# Altium PCB PTT Board.PcbDoc
Units mm, origin at the board's own origin, x right, y up, seen from the top; angles counter-clockwise.
Board outline 40 x 13.25 mm, 2 copper layers (Top Layer, Bottom Layer), stack 1.621 mm thick; 8 components, 6 nets, 26 pads, 1 vias.
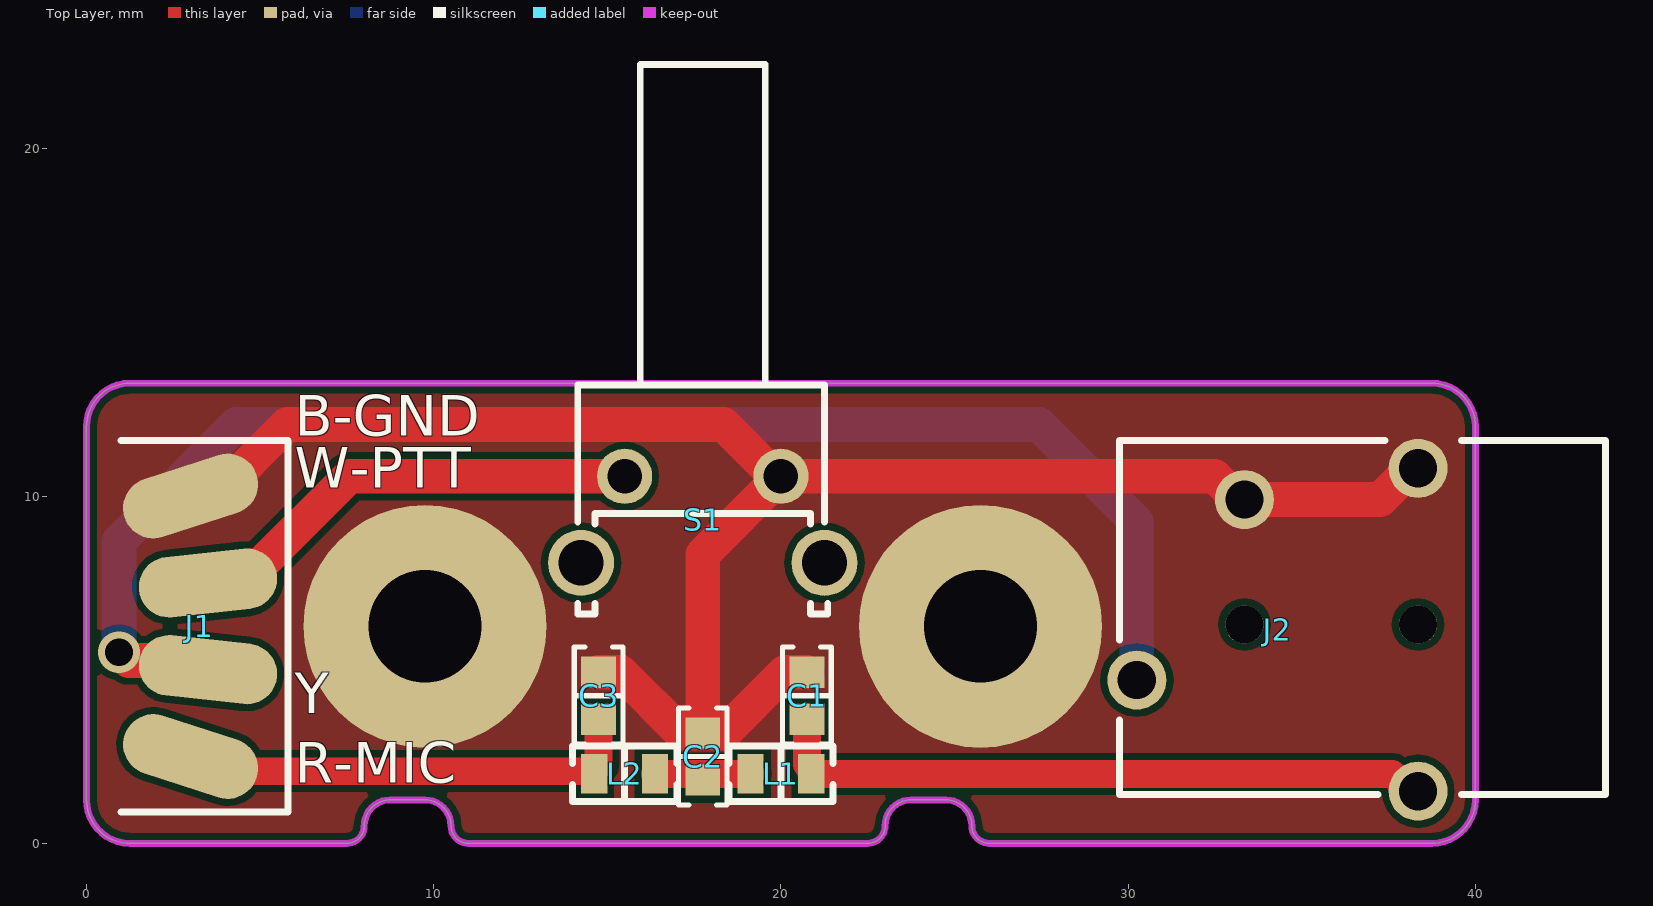
[diagram p0: Top Layer view]
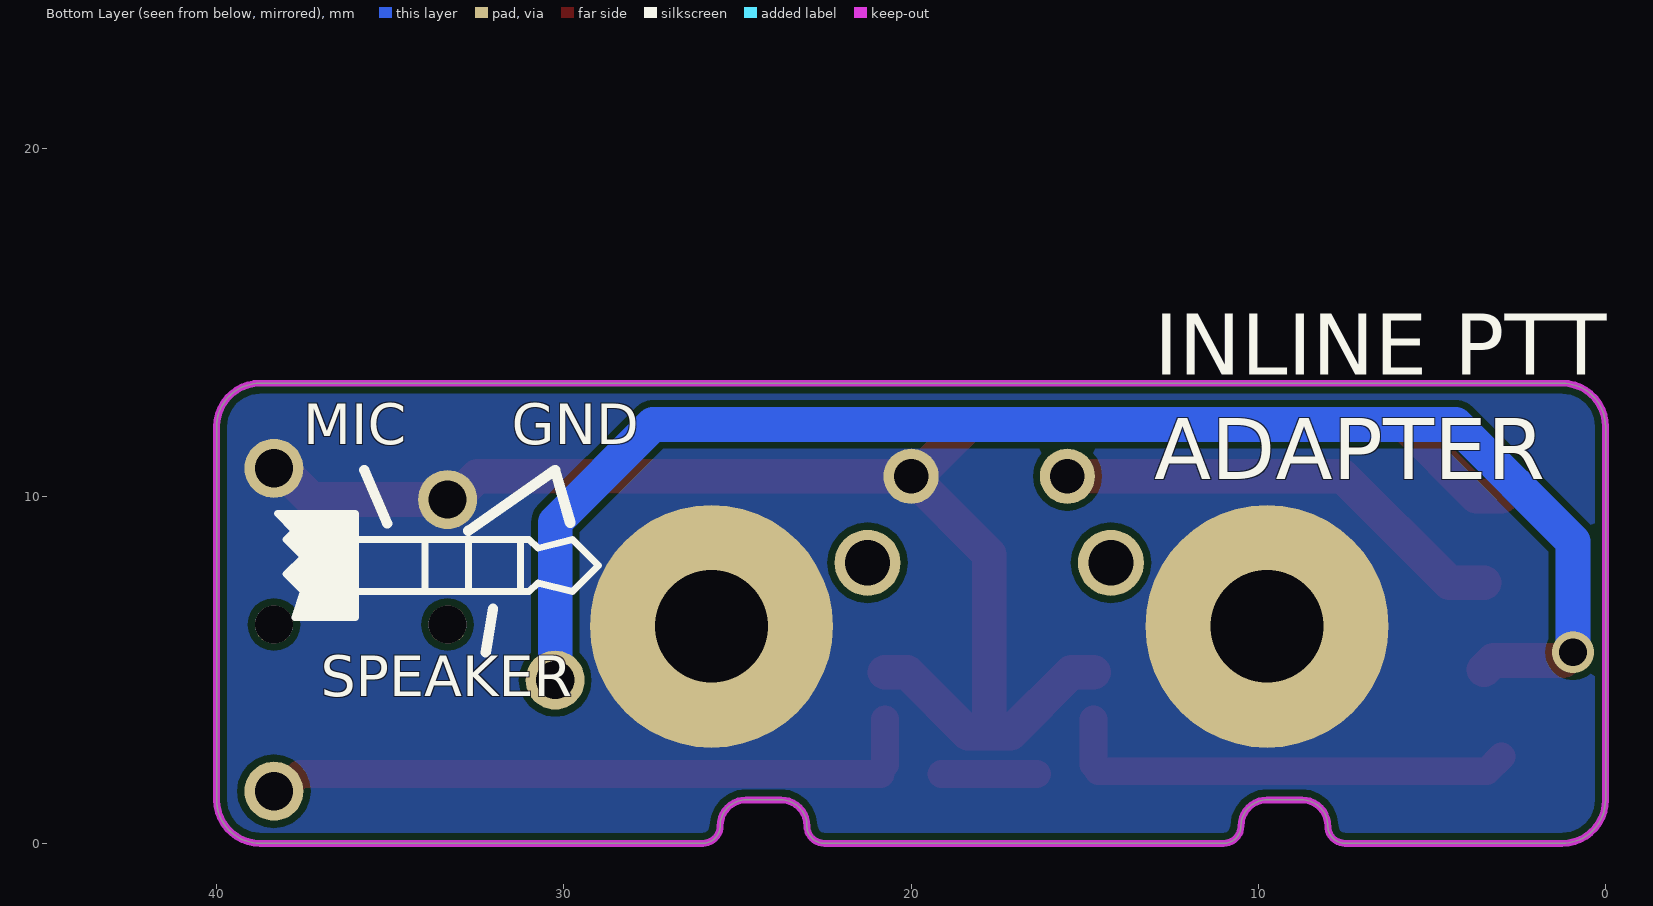
[diagram p1: Bottom Layer view, seen from below]
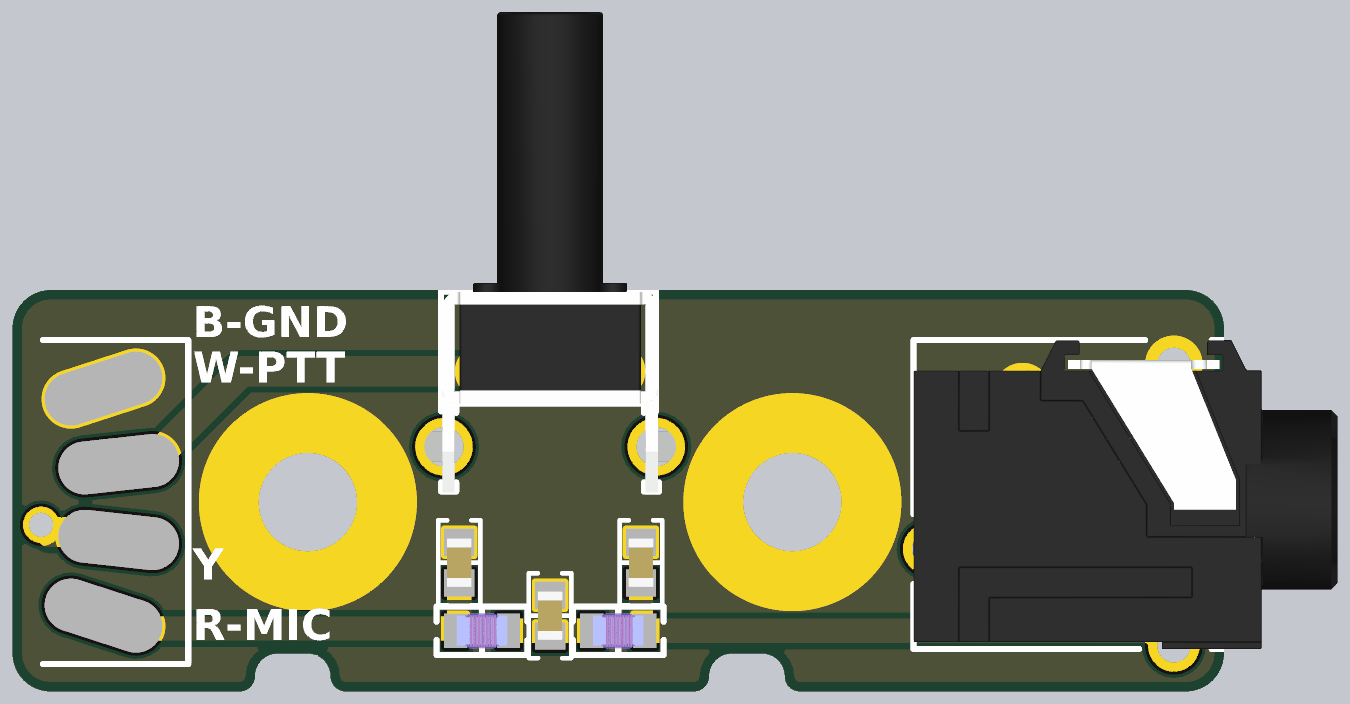
[diagram p2: 3D render of the assembled board from above, using the file's embedded part models]

## Layer stack, top to bottom
Top Solder: solder mask 0.0102, Solder Resist, Dk 3.5
Top Layer: signal copper 0.0356
Dielectric1: core 1.55, FR-4, Dk 4.8
Bottom Layer: signal copper 0.0356
Bottom Solder: solder mask 0.0102, Solder Resist, Dk 3.5

## Board outline
1.25,0 7.5,0 ccw(c7.5,0.5) 8,0.5 cw(c8.75,0.5) 8.75,1.25 9.75,1.25 cw(c9.75,0.5) 10.5,0.5 ccw(c11,0.5) 11,0 22.5,0 ccw(c22.5,0.5) 23,0.5 cw(c23.75,0.5) 23.75,1.25 24.75,1.25 cw(c24.75,0.5) 25.5,0.5 ccw(c26,0.5) 26,0 38.75,0 ccw(c38.75,1.25) 40,1.25 40,12 ccw(c38.75,12) 38.75,13.25 1.25,13.25 ccw(c1.25,12) 0,12 0,1.25 ccw(c1.25,1.25)

## Design rules (kind name [scope] priority, off if disabled: settings)
Clearance PadClearance [IsPad vs IsPad] p1: gap=0.2 ignorepadtopadclearanceinfootprint=FALSE except(0: Arc-Hole Track-Hole SMDPad-Hole THPad-Hole Via-Hole Fill-Hole Poly-Hole Region-Hole Text-Hole)
Clearance [All] p2: gap=0.2 ignorepadtopadclearanceinfootprint=FALSE except(0: Arc-Hole Track-Hole SMDPad-Hole THPad-Hole Via-Hole Fill-Hole Poly-Hole Region-Hole Text-Hole)
HoleSize [All] p1: absolutevalues=TRUE maxlimit=6 minlimit=0.4 maxpercent=80.000 minpercent=20.000
HoleToHoleClearance [All] p1: gap=0.2 allowstackedmicrovias=TRUE
MinimumSolderMaskSliver [All] p1: minsoldermaskwidth=0
PolygonConnect ViaConnect [IsVia] p1: connectstyle=Direct reliefconductorwidth=0.254 reliefentries=4 polygonreliefangle="90 Angle" airgapwidth=0.254
PolygonConnect [All] p2: connectstyle=Direct reliefconductorwidth=0.3 reliefentries=4 polygonreliefangle="90 Angle" airgapwidth=0.254
RoutingVias [All] p1: holewidth=0.6 width=1 viastyle="Through Hole" minholewidth=0.4 minwidth=0.8 maxholewidth=5 maxwidth=6
SilkToSilkClearance [All] p1: silktosilkclearance=0
SilkToSolderMaskClearance SilkscreenOverComponentPads [IsPad] p1: minsilkscreentomaskgap=0.05 clearancetoexposedcopper=TRUE
SolderMaskExpansion "Via Tenting" [IsVia] p1: expansion=-2 istentingtop=FALSE
SolderMaskExpansion [All] p2: expansion=0.102 istentingtop=FALSE
Width [All] p1: maxlimit=2 minlimit=0.2 preferedwidth=0.4
25 further rules are at their usual default settings.

## Components (designator, comment, footprint, x,y, rotation, side; value= is the part's Value field where it differs from the comment)
C1 "33pF" "CAP 0603_1608" 20.75,4.25 r270 top
C2 "30pF" "CAP 0603_1608" 17.75,2.5 r270 top
C3 "6.8pF" "CAP 0603_1608" 14.75,4.25 r270 top
J1 "4 Pin" Wire2Board 3.5,6.25 r0 top
J2 "SJ-43514" "CUI SJ-43514" 36.75,6.5 r270 top
L1 "820nH" "IND 0603_1608 RF WW" 20,2 r180 top
L2 "430nH" "IND 0603_1608 RF WW" 15.5,2 r180 top
S1 "2-1825027-0" "TE 2-1825027-0" 17.75,14.5 r0 top

## Footprints (in the part's own frame and the unit in brackets; to place one, negate y for a bottom-side part, rotate by r counter-clockwise, add the part's x,y. Pads: shape width x height; smd on the part's side, far side on the other; paste and mask are expansions set on the pad)
"CAP 0603_1608" [mm] "Chip Capacitor, 2-Leads, Body 1.60x0.80mm, IPC Medium Density"
  rect 0.9x1 smd: 1(-0.675,0) 2(0.675,0)
  silkscreen extent -1.4,-0.7 1.4,0.7, body extent -0.8,-0.41 0.8,0.41, height 0.82
"CUI SJ-43514" [mm] "3.50mm (0.141\", 1/8\", Mini Plug) - Headphone Phone Jack Stereo (4 Conductor, TRRS) Connector Solder"
  round 1.7 hole 1.1: 1(5,1.6) 2(-3.4,-3.4) 3(1.8,-6.5) 4(-4.3,1.6)
  round 1.1 hole 1.1 unplated: M(0.2,1.6) M(0.2,-3.4)
  silkscreen extent -5.1,-7 5.1,7, body extent -5.1,-7 5.1,7, height 5.25
"IND 0603_1608 RF WW" [mm] "Chip Inductor, 2-Leads, Body 1.65x0.99mm, IPC Medium Density"
  rect 0.76x1.13 smd: 1(-0.875,0) 2(0.875,0)
  silkscreen extent -1.5,-0.8 1.5,0.8, body extent -0.84,-0.58 0.83,0.58, height 1
"TE 2-1825027-0" [mm] "actile Switches, Round Actuator Style, Operating Function NO,Right Angle, Body 15.53x7.11mm, Pitch 2.25mm"
  round 1.59 hole 0.99: 1(2.25,-3.931) 2(-2.25,-3.931)
  round 1.9 hole 1.3: S(-3.505,-6.421) S(3.505,-6.421)
  silkscreen extent -3.6,-7.9 3.6,7.93, body extent -4.2,-7.93 4.2,7.93, height 7.01
Wire2Board [mm]
  oval 4x1.75 smd rot 18: 1(-0.5,3.75)
  oval 4x1.75 smd rot 6.25: 2(0,1.25)
  oval 4x1.75 smd rot 173.75: 3(0,-1.25)
  oval 4x1.75 smd rot 162: 4(-0.5,-3.75)
  silkscreen extent -2.5,-5.35 2.3,5.35

## Part data
C1: library part 06035A330KAT2A, "CAP CER 33PF 50V C0G/NP0 0603", Device Package="0603 (1608 Metric)", Manufacturer="AVX Corporation", Operating Temperature="-55°C ~ 125°C", Supplier Part Number 1=478-12701-1-ND, Temperature Coefficient="C0G, NP0", Tolerance=±10%, Voltage - Rated=50V, Applications="General Purpose", Capacitance=33pF, ComponentLink1Description=Datasheet, ComponentLink1URL=http://datasheets.avx.com/C0GNP0-Dielectric.pdf, ComponentLink2Description="DigiKey Link", ComponentLink2URL=http://digikey.com/product-detail/en/avx-corporation/06035A330KAT2A/478-12701-1-ND/9949235, LastUpdated="02/09/2020 01:03:28", Lifecycle Status=Active, Minimum Order=1, Mounting Type="Surface Mount, MLCC", Package / Case="0603 (1608 Metric)", Packaging=TapeAndReel, Part Number=06035A330KAT2A, Part Status=Active, PartId=6504, Price=0.01, Series=-, Size / Dimension="0.063\" L x 0.032\" W (1.60mm x 0.81mm)", Supplier 1=DigiKey, Thickness (Max)="0.035\" (0.90mm)"
C2: library part CL10C300JB8NNNC, "CAP CER 30PF 50V C0G/NP0 0603", Device Package="0603 (1608 Metric)", Manufacturer="Samsung Electro-Mechanics", Operating Temperature="-55°C ~ 125°C", Supplier Part Number 1=1276-1021-1-ND, Temperature Coefficient="C0G, NP0", Tolerance=±5%, Voltage - Rated=50V, Applications="General Purpose", Capacitance=30pF, ComponentLink1Description=Datasheet, ComponentLink1URL=http://www.samsungsem.com/kr/support/product-search/mlcc/CL10C300JB8NNNC.jsp, ComponentLink2Description="DigiKey Link", ComponentLink2URL=http://digikey.com/product-detail/en/samsung-electro-mechanics/CL10C300JB8NNNC/1276-1021-1-ND/3889107, LastUpdated="02/09/2020 01:03:30", Lifecycle Status=Active, Minimum Order=1, Mounting Type="Surface Mount, MLCC", Package / Case="0603 (1608 Metric)", Packaging=TapeAndReel, Part Number=CL10C300JB8NNNC, Part Status=Active, PartId=5764, Price=0.01, Series=CL, Size / Dimension="0.063\" L x 0.031\" W (1.60mm x 0.80mm)", Supplier 1=DigiKey, Thickness (Max)="0.035\" (0.90mm)"
C3: library part 06035A6R8DAT2A, "CAP CER 6.8PF 50V NP0 0603", Device Package="0603 (1608 Metric)", Manufacturer="AVX Corporation", Operating Temperature="-55°C ~ 125°C", Supplier Part Number 1=478-10335-1-ND, Temperature Coefficient="C0G, NP0", Tolerance=±0.5pF, Voltage - Rated=50V, Applications="General Purpose", Capacitance=6.8pF, ComponentLink1Description=Datasheet, ComponentLink1URL=http://datasheets.avx.com/C0GNP0-Dielectric.pdf, ComponentLink2Description="DigiKey Link", ComponentLink2URL=http://digikey.com/product-detail/en/avx-corporation/06035A6R8DAT2A/478-10335-1-ND/6797496, LastUpdated="02/09/2020 01:03:30", Lifecycle Status=Active, Minimum Order=1, Mounting Type="Surface Mount, MLCC", Package / Case="0603 (1608 Metric)", Packaging=TapeAndReel, Part Number=06035A6R8DAT2A, Part Status=Active, PartId=5815, Price=0.01, Series=-, Size / Dimension="0.063\" L x 0.032\" W (1.60mm x 0.81mm)", Supplier 1=DigiKey, Thickness (Max)="0.035\" (0.90mm)"
J2: "CONN JACK 4COND 3.5MM R/A", Manufacturer="CUI Devices", Operating Temperature="-20°C ~ 85°C", Supplier Part Number 1=CP-43514-ND, Actual Diameter="0.142\" (3.60mm)", ComponentLink1Description=Datasheet, ComponentLink1URL=https://www.cuidevices.com/product/resource/digikeypdf/sj-4351x.pdf, ComponentLink2Description="DigiKey Link", ComponentLink2URL=http://digikey.com/product-detail/en/cui-devices/SJ-43514/CP-43514-ND/368146, Connector Type="Phone Jack", Gender=Female, Industry Recognized Mating Diameter="3.50mm (0.141\", 1/8\", Mini Plug) - Headphone", Internal Switch(s)="Does Not Contain Switch", LastUpdated="06/09/2020 11:27:36", Lifecycle Status=Active, Minimum Order=1, Mounting Type="Through Hole, Right Angle", Number of Positions/Contacts="4 Conductors, 4 Contacts", Packaging=Tray, Part Number=SJ-43514, Part Status=Active, Price=1.06, Series=SJ, Shielding=Unshielded, Signal Lines="Stereo (4 Conductor, TRRS)", Supplier 1=DigiKey, Termination=Solder
L1: library part BRC1608TR82M6, "FIXED IND 820NH 730MA 176 MOHM", Current - Saturation=950mA, Current Rating (Amps)=730mA, DC Resistance (DCR)=176mOhm, Device Package="0603 (1608 Metric)", Frequency - Self Resonant=560MHz, Inductance Frequency - Test=6MHz, Manufacturer="Taiyo Yuden", Operating Temperature="-40°C ~ 105°C", Supplier Part Number 1=587-3224-1-ND, Tolerance=±20%, ComponentLink1Description=Datasheet, ComponentLink1URL="https://ds.yuden.co.jp/TYCOMPAS/ut/detail?pn=BRC1608TR82M6  &u=M", ComponentLink2Description="DigiKey Link", ComponentLink2URL=http://digikey.com/product-detail/en/taiyo-yuden/BRC1608TR82M6/587-3224-1-ND/3479477, Height - Seated (Max)="0.039\" (1.00mm)", Inductance=820nH, LastUpdated="06/09/2020 11:05:21", Lifecycle Status=Active, Material - Core=Ferrite, Minimum Order=1, Mounting Type="Surface Mount", Package / Case="0603 (1608 Metric)", Packaging=TapeAndReel, Part Number=BRC1608TR82M6, Part Status=Active, PartId=1489, Price=0.12, Series="BR, C Type", Shielding=Unshielded, Size / Dimension="0.063\" L x 0.031\" W (1.60mm x 0.80mm)", Supplier 1=DigiKey, Supplier Device Package="0603 (1608 Metric)", Type=Wirewound
L2: library part BRC1608TR43M6, "FIXED IND 430NH 1.1A 82 MOHM SMD", Current - Saturation=1.4A, Current Rating (Amps)=1.1A, DC Resistance (DCR)=82mOhm, Device Package="0603 (1608 Metric)", Frequency - Self Resonant=740MHz, Inductance Frequency - Test=6MHz, Manufacturer="Taiyo Yuden", Operating Temperature="-40°C ~ 105°C", Supplier Part Number 1=587-3220-1-ND, Tolerance=±20%, ComponentLink1Description=Datasheet, ComponentLink1URL="https://ds.yuden.co.jp/TYCOMPAS/ut/detail?pn=BRC1608TR43M6  &u=M", ComponentLink2Description="DigiKey Link", ComponentLink2URL=http://digikey.com/product-detail/en/taiyo-yuden/BRC1608TR43M6/587-3220-1-ND/3479466, Height - Seated (Max)="0.039\" (1.00mm)", Inductance=430nH, LastUpdated="06/09/2020 11:05:21", Lifecycle Status=Active, Material - Core=Ferrite, Minimum Order=1, Mounting Type="Surface Mount", Package / Case="0603 (1608 Metric)", Packaging=TapeAndReel, Part Number=BRC1608TR43M6, Part Status=Active, PartId=1442, Price=0.12, Series="BR, C Type", Shielding=Unshielded, Size / Dimension="0.063\" L x 0.031\" W (1.60mm x 0.80mm)", Supplier 1=DigiKey, Supplier Device Package="0603 (1608 Metric)", Type=Wirewound
S1: "SWITCH TACTILE SPST-NO 0.05A 24V", Contact Rating @ Voltage="0.05A @ 24VDC", Manufacturer="TE Connectivity ALCOSWITCH Switches", Operating Force=160gf, Operating Temperature="-35°C ~ 85°C", Supplier Part Number 1=450-1661-ND, Actuator Length, Right Angle=11.85mm, Actuator Orientation="Side Actuated", Actuator Type=Standard, Circuit=SPST-NO, ComponentLink1Description=Datasheet, ComponentLink1URL=https://www.te.com/commerce/DocumentDelivery/DDEController?Action=srchrtrv&DocNm=1308111-1_SWITCHES_CORE_PROGRAM_CATALOG&DocType=CS&DocLang=English, ComponentLink2Description="DigiKey Link", ComponentLink2URL=http://digikey.com/product-detail/en/te-connectivity-alcoswitch-switches/2-1825027-0/450-1661-ND/1632547, Illumination=Non-Illuminated, LastUpdated="06/09/2020 11:08:27", Lifecycle Status=Active, Minimum Order=1, Mounting Type="Through Hole, Right Angle", Outline="7.11mm x 6.60mm", Packaging=Bulk, Part Number=2-1825027-0, Part Status=Active, Price=0.22, Series=FSMRAJ, Supplier 1=DigiKey, Switch Function=Off-Mom, Termination Style="PC Pin"

## Free pads (board coordinates)
  round 7 hole 3.25: M(9.75,6.25) M(25.75,6.25)

## Via types
v1: diameter 1.2, hole 0.8, Top Layer to Bottom Layer, 1 vias

## Nets (pads, with @x,y where several pads share a name; then routed paths per layer and width w, separated by ;. In a path a pad name is that pad's centre, name@x,y a point inside that pad or via, vN(x,y) a via of type N, cw(c..) or ccw(c..) an arc to the next point about the centre after c; other vN are vias at no path point)
GND: C1.1 C2.1 C3.1 J1.1 J2.2 J2.4 pad.M S1.1 | length 53.3
  Top Layer w1: J1.1 3.722,10 5.787,12.064 18.345,12.064 19.84,10.569 S1.1 ; C3.1 15.385,4.925 17.135,3.175 C2.1 ; C1.1 20.115,4.925 18.365,3.175 C2.1 ; J2.4 38.161,10.8 37.261,9.9 33.161,9.9 32.491,10.569 S1.1 ; C2.1 17.75,8.319 S1.1
MIC_FILT: C3.2 J1.4 L2.2 | length 13.3
  Top Layer w0.8: J1.4 3.424,2.076 14.605,2.076 14.605,2.125 14.75,2.27 C3.2
MIC_IN: C1.2 J2.1 L1.1 | length 19.3
  Top Layer w0.8: C1.2 20.75,2.27 20.875,2.145 L1.1 37.606,2 38.107,1.5 J2.1
NetC2_2: C2.2 L1.2 L2.1 | length 2.8
  Top Layer w0.8: L2.1 L1.2
PTT: J1.2 S1.2 | length 13.3
  Top Layer w1: J1.2 4.496,7.5 7.565,10.569 S1.2
SPKR: J1.3 J2.3 | length 42.4
  Top Layer w1: v1(0.94,5.5) 0.994,5.5 1.228,5.266 3.234,5.266 J1.3
  Bottom Layer w1: v1(0.94,5.5) 0.94,8.69 4.314,12.064 27.436,12.064 30.25,9.25 J2.3
pads on no net: J2.M S1.S

## Polygon pours and split planes (outlines as drawn)
GND on Top Layer "GND_L01_P000" (solid, remove dead copper, pour order 0): 0,0 40,0 40,13.25 0,13.25
GND on Bottom Layer "GND_L02_P001" (solid, remove dead copper, pour order 1): 0,0 0,13.25 40,13.25 40,0

## Keep-outs
Keep-Out Layer:
  the board outline again, w0.2

## Silkscreen, mask and mechanical layers (free items; w line width, h text height)
Top Overlay:
  text "B-GND" at 6,11.349 h2
  text "W-PTT" at 6,9.849 h2
  text "Y" at 6,3.351 h2
  text "R-MIC" at 6,1.349 h2
Bottom Overlay:
  region: 38.25,9.5 37.75,9 38,8.75 37.5,8.25 38,7.75 37.5,7.25 37.75,6.5 36,6.5 36,9.5
  lines w0.2: 31.25,7.25 31,7.25 30.75,7.5 29.75,7.25 29,8 29.75,8.75 30.75,8.5 31,8.75 31.25,8.75 ; 31.25,7.25 31.25,8.75 ; 31.25,7.25 31.5,7.25 32.75,7.25 ; 31.25,8.75 32.75,8.75 ; 31.25,8.75 31.25,8.75 ; 32.75,7.25 32.75,8.75 ; 32.75,7.25 34,7.25 ; 32.75,8.75 34,8.75 ; 34,7.25 34,8.75 ; 34,7.25 36,7.25 ; 34,8.75 36,8.75 ; 36,7.25 36,8.75 ; 36,7.25 36,6.5 37.75,6.5 37.5,7.25 38,7.75 37.5,8.25 38,8.75 37.75,9 38.25,9.5 36,9.5 36,8.75
  lines w0.3: 29.816,9.231 30.25,10.75 32.75,9 ; 32.041,6.757 32.25,5.5 ; 35.091,9.211 35.75,10.75
  text "GND" at 31.5,11.099 h2
  text "MIC" at 37.5,11.099 h2
  text "INLINE PTT / ADAPTER" at 13,9.913 h3
  text "SPEAKER" at 37,3.849 h2